# EAGLE board CT_schematic (EAGLE 7.6.0)

Size 100 x 80 mm. Coordinates in mm from the lower left corner, seen from the top.
Outline: 0,0 100,0 100,80 0,80 0,0
Copper layers (1*16): Top 0.035mm / dielectric 1.5mm / Bottom 0.035mm
Design rules "default": minimum track width 10mil, minimum drill 24mil, track to track 8mil, track to pad 8mil, pad to pad 8mil, via to via 8mil, smd to smd 8mil, copper to edge 40mil, drill to drill 8mil, minimum pad ring 10mil, minimum via ring 8mil, stop-mask expansion 4mil, vias tented up to drill 0mil, thermal gap 10mil

## Footprints (pad centres in the part's own frame; a part is rotated, then mirrored left to right if it is on the bottom)
C0603 = smd 0.8 x 0.8: 1 -0.762,0; 2 0.762,0
C0402 = smd 0.5 x 0.5: 1 -0.508,0; 2 0.508,0
C0805 = smd 1.2 x 1.3: 1 -1.016,0; 2 1.016,0
C1206 = smd 1.3 x 1.6: 1 -1.524,0; 2 1.524,0
C1210 = smd 1.2 x 2.5: 1 -1.524,0; 2 1.524,0
EXV-9H = smd 3.505 x 1.676: 1 -2.857,0; 2 2.857,0
L0603 = smd 0.8 x 0.8: 1 -0.762,0; 2 0.762,0
PJ-037B_PACKAGE = drill 3.7 square: 1 12,0 | drill 3.2 square: 2 6,0
R0603 = smd 0.8 x 0.8: 1 -0.762,0; 2 0.762,0
WLCSP36 = smd 0.229 x 0.229: A1 -1,1; A2 -0.6,1; A3 -0.2,1; A4 0.2,1; A5 0.6,1; A6 1,1; B1 -1,0.6; B2 -0.6,0.6; B3 -0.2,0.6; B4 0.2,0.6; B5 0.6,0.6; B6 1,0.6; C1 -1,0.2; C2 -0.6,0.2; C3 -0.2,0.2; C4 0.2,0.2; C5 0.6,0.2; C6 1,0.2; D1 -1,-0.2; D2 -0.6,-0.2; D3 -0.2,-0.2; D4 0.2,-0.2; D5 0.6,-0.2; D6 1,-0.2; E1 -1,-0.6; E2 -0.6,-0.6; E3 -0.2,-0.6; E4 0.2,-0.6; E5 0.6,-0.6; E6 1,-0.6; F1 -1,-1; F2 -0.6,-1; F3 -0.2,-1; F4 0.2,-1; F5 0.6,-1; F6 1,-1
SSOP-28 = smd 1.5 x 0.4: 1 -3.625,4.225; 2 -3.625,3.575; 3 -3.625,2.925; 4 -3.625,2.275; 5 -3.625,1.625; 6 -3.625,0.975; 7 -3.625,0.325; 8 -3.625,-0.325; 9 -3.625,-0.975; 10 -3.625,-1.625; 11 -3.625,-2.275; 12 -3.625,-2.925; 13 -3.625,-3.575; 14 -3.625,-4.225; 15 3.625,-4.225; 16 3.625,-3.575; 17 3.625,-2.925; 18 3.625,-2.275; 19 3.625,-1.625; 20 3.625,-0.975; 21 3.625,-0.325; 22 3.625,0.325; 23 3.625,0.975; 24 3.625,1.625; 25 3.625,2.275; 26 3.625,2.925; 27 3.625,3.575; 28 3.625,4.225
FCI_10118193-0001LF = smd 0.4 x 1.35: 1 -1.3,2.675; 2 -0.65,2.675; 3 0,2.675; 4 0.65,2.675; 5 1.3,2.675 | smd 1.6 x 1.4: 6 -3.2,2.45; 7 3.2,2.45 | smd 1.9 x 1.9: 8 -1.2,0; 9 1.2,0 | hole 0.5: -3.3,0; 3.3,0
TST-110-05-T-D-RA = drill 1 pad 1.7 square: 1 0,0 | drill 1 pad 1.7: 2 0,2.54; 3 2.54,0; 4 2.54,2.54; 5 5.08,0; 6 5.08,2.54; 7 7.62,0; 8 7.62,2.54; 9 10.16,0; 10 10.16,2.54; 11 12.7,0; 12 12.7,2.54; 13 15.24,0; 14 15.24,2.54; 15 17.78,0; 16 17.78,2.54; 17 20.32,0; 18 20.32,2.54; 19 22.86,0; 20 22.86,2.54
DFN-6 = smd 0.805 x 0.3: 1 -0.952,0.5; 2 -0.952,0; 3 -0.952,-0.5; 4 0.952,-0.5; 5 0.952,0; 6 0.952,0.5 | smd 0.61 x 1.42: 7 0,0
ASEK = smd 1.4 x 1: 1 -1.1,-0.8; 2 1.1,-0.8; 3 1.1,0.8; 4 -1.1,0.8
ASFL1 = smd 1.7 x 1.5: 1 -1.27,-1.1; 2 1.27,-1.1; 3 1.27,1.1; 4 -1.27,1.1
WSON-8 = smd 0.3 x 0.6: 1 -0.75,0; 2 0.05,0; 3 0.85,0; 4 1.65,0; 5 1.65,3.8; 6 0.85,3.8; 7 0.05,3.8; 8 -0.75,3.8 | smd 3 x 2.6: PAD 0.45,1.9
SON-6 = smd 0.55 x 0.3: 1 -0.355,0.5 | smd 0.52 x 0.3: 2 -0.37,0; 3 -0.37,-0.5; 4 0.37,-0.5; 5 0.37,0; 6 0.37,0.5
SW_4-1437565-2 = smd 1.4 x 2.1: 1 -2.23,4.55; 2 -2.23,-4.55; 3 2.23,4.55; 4 2.23,-4.55
LGM67K-G1J2-24-Z = smd 0.8 x 1.4: A -2,0; C 0,0
NC7SZ125M5X = smd 1.3 x 0.7: 1 -1.3,0.95; 2 -1.3,0; 3 -1.3,-0.95; 4 1.3,-0.95; 5 1.3,0.95

## Placement (x,y rotation side)
C1  1e-07  [C0603]  -62.23,50.8 0 top  (outside the outline)
C2  1e-07  [C0603]  -15.24,55.88 0 top  (outside the outline)
C3  4.7e-06  [C0603]  -54.61,50.8 0 top  (outside the outline)
C4  1e-07  [C0603]  -19.05,55.88 0 top  (outside the outline)
C5  4.7e-06  [C0603]  -58.42,50.8 0 top  (outside the outline)
C6  1e-08  [C0603]  -22.86,55.88 0 top  (outside the outline)
C7  1e-08  [C0603]  -26.67,55.88 0 top  (outside the outline)
C8  1e-06  [C0603]  -30.48,55.88 0 top  (outside the outline)
C9  1e-07  [C0402]  -19.05,60.96 0 top  (outside the outline)
C10  4.7e-06  [C0805]  -59.69,43.18 0 top  (outside the outline)
C11  1e-07  [C0402]  -22.86,60.96 0 top  (outside the outline)
C12  1e-07  [C0402]  -26.67,60.96 0 top  (outside the outline)
C13  1e-07  [C0402]  -30.48,60.96 0 top  (outside the outline)
C14  1e-07  [C0402]  -34.29,60.96 0 top  (outside the outline)
C15  1e-08  [C0402]  -38.1,60.96 0 top  (outside the outline)
C16  1e-08  [C0402]  -41.91,60.96 0 top  (outside the outline)
C17  1e-08  [C0402]  -45.72,60.96 0 top  (outside the outline)
C18  1e-08  [C0402]  -49.53,60.96 0 top  (outside the outline)
C19  1e-05  [C1206]  -41.91,43.18 0 top  (outside the outline)
C20  1e-05  [C1210]  -29.21,44.45 0 top  (outside the outline)
C21  1e-07  [C0402]  -53.34,60.96 0 top  (outside the outline)
C22  0.0001  [EXV-9H]  -38.1,36.83 0 top  (outside the outline)
C23  0.0001  [EXV-9H]  -49.53,36.83 0 top  (outside the outline)
C24  1e-08  [C0402]  -57.15,60.96 0 top  (outside the outline)
C25  1e-08  [C0402]  -60.96,60.96 0 top  (outside the outline)
F1  240.0  [L0603]  -34.29,55.88 0 top  (outside the outline)
J1  PJ-037B  [PJ-037B_PACKAGE]  -40.64,7.62 0 top  (outside the outline)
R1  10000.0  [R0603]  -25.4,50.8 0 top  (outside the outline)
R2  1000.0  [R0603]  -38.1,55.88 0 top  (outside the outline)
R3  1600.5  [R0603]  -41.91,55.88 0 top  (outside the outline)
R4  4700.0  [R0603]  -45.72,55.88 0 top  (outside the outline)
R5  2200.0  [R0603]  -49.53,55.88 0 top  (outside the outline)
R6  2200.0  [R0603]  -53.34,55.88 0 top  (outside the outline)
R7  4700.0  [R0603]  -57.15,55.88 0 top  (outside the outline)
R8  10000.0  [R0603]  -30.48,50.8 0 top  (outside the outline)
R9  10000.0  [R0603]  -35.56,50.8 0 top  (outside the outline)
R10  10000.0  [R0603]  -40.64,50.8 0 top  (outside the outline)
R11  100000.0  [R0603]  -64.77,43.18 0 top  (outside the outline)
R12  2231.0  [R0603]  -60.96,55.88 0 top  (outside the outline)
R13  1000.0  [R0603]  -64.77,55.88 0 top  (outside the outline)
R14  10000.0  [R0603]  -45.72,50.8 0 top  (outside the outline)
R15  10000.0  [R0603]  -50.8,50.8 0 top  (outside the outline)
R16  9100.0  [R0603]  -15.24,60.96 0 top  (outside the outline)
R17  680000.0  [R0603]  -15.24,50.8 0 top  (outside the outline)
R18  120000.0  [R0603]  -20.32,50.8 0 top  (outside the outline)
U1  stm32f042t6y7  [WLCSP36]  -34.29,43.18 0 top  (outside the outline)
U2  FT232RL-REEL  [SSOP-28]  -20.32,7.62 0 top  (outside the outline)
U3  10118193-0001LF  [FCI_10118193-0001LF]  -19.05,27.94 0 top  (outside the outline)
U4  TST-110-05-T-D-RA  [TST-110-05-T-D-RA]  -58.42,26.67 0 top  (outside the outline)
U5  SI7006-A20-IM  [DFN-6]  -64.77,59.69 0 top  (outside the outline)
U6  ASEK-32.768KHz-ECST  [ASEK]  -29.21,36.83 0 top  (outside the outline)
U7  ASFL1-12MHZ-NCS  [ASFL1]  -46.99,20.32 0 top  (outside the outline)
U8  ASFL1-25MHZ-NCS  [ASFL1]  -63.5,20.32 0 top  (outside the outline)
U9  LP3878SDX-ADJ/NOPB  [WSON-8]  -30.48,17.78 0 top  (outside the outline)
U10  TPS3895ADRYR  [SON-6]  -13.97,64.77 0 top  (outside the outline)
U11  4-1437565-2  [SW_4-1437565-2]  -57.15,6.35 0 top  (outside the outline)
U12  Q65110A2395  [LGM67K-G1J2-24-Z]  -17.78,44.45 0 top  (outside the outline)
U13  nc7sz125m5x  [NC7SZ125M5X]  -46.99,43.18 0 top  (outside the outline)
U14  nc7sz125m5x  [NC7SZ125M5X]  -53.34,43.18 0 top  (outside the outline)

## Library data of the parts
C1-C25 F1 J1 R1-R18 U1-U14 = circuit_tree

## Nets
CLK_U1_B5: U1.B5 U8.3
CLK_U1_B6: U1.B6 U6.3
CLK_U2_27: U2.27 U7.3
GND: C1.2 C2.2 C3.2 C4.2 C5.2 C6.2 C7.2 C8.2 C9.2 C10.2 C11.2 C12.2 C13.2 C14.2 C15.2 C16.2 C17.2 C18.2 C19.2 C20.2 C21.2 C22.2 C23.2 C24.2 C25.2 J1.2 R2.2 R9.2 R13.2 R16.2 R18.2 U1.D6 U1.F1 U2.7 U2.18 U2.21 U2.25 U2.26 U3.5 U3.6 U3.7 U3.8 U3.9 U4.4 U4.6 U4.8 U4.10 U4.12 U4.14 U4.16 U4.18 U4.20 U5.2 U5.7 U6.2 U7.2 U8.2 U9.3 U9.PAD U10.2 U12.C U13.2 U13.3 U14.1 U14.3
NET_U1_B4: R5.1 U1.B4 U5.6
NET_U1_C1: R6.1 U1.C1 U5.1
NET_U1_D5: R4.1 U1.D5 U14.4
NET_U1_E5: C6.1 C7.1 C8.1 F1.1 U1.E5
NET_U1_F5: R3.1 U1.F5 U12.A
NET_U1_F6: R1.1 U1.F6 U11.3 U11.4
NET_U2_14: R8.1 U2.14
NET_U2_17: C11.1 U2.17
NET_U2_19: R9.1 U2.19
NET_U3_1: R7.1 U3.1
NET_U3_2: U2.16 U3.2
NET_U3_3: U2.15 U3.3
NET_U3_19: R7.2
NET_U9_1: C18.1 U9.1
NET_U9_6: R12.2 R13.1 U9.6
NET_U9_8: R11.1 U9.8
NET_U10_1: R15.1 R16.1 U10.1
NET_U10_3: R17.2 R18.1 U10.3
NET_U10_4: R14.1 U10.4 U13.4 U14.2
NET_U11_1: R2.1 U11.1 U11.2
PROC_SYS_SWCLK: U1.B2 U4.9
PROC_SYS_SWDIO: U1.B1 U4.7
PROC_USART1_CTS: U1.C2 U2.3
PROC_USART1_RTS: U1.A1 U2.11
PROC_USART1_RX: U1.A4 U2.1
PROC_USART1_TX: U1.C4 U2.5
RST_OUT_U4_SRESET_B: R10.1 U4.15 U13.1
VCC_S1_11V0: C19.1 C22.1 C23.1 J1.1 R11.2 U9.4
VCC_TIER1_3V3: C1.1 C2.1 C3.1 C4.1 C5.1 C9.1 C10.1 C12.1 C13.1 C14.1 C15.1 C16.1 C17.1 C20.1 C21.1 C24.1 C25.1 F1.2 R1.2 R3.2 R4.2 R5.2 R6.2 R8.2 R10.2 R12.1 R14.2 R15.2 R17.1 U1.A5 U1.E1 U2.4 U2.20 U4.1 U5.5 U6.4 U7.4 U8.4 U9.5 U10.6 U13.5 U14.5

## Tracks (layer width: path | path; a pad name or v marks a point on that pad's centre or on a via)
CLK_U1_B5  (1 unrouted)
CLK_U1_B6  (1 unrouted)
CLK_U2_27  (1 unrouted)
GND  (64 unrouted)
NET_U1_B4  (2 unrouted)
NET_U1_C1  (2 unrouted)
NET_U1_D5  (2 unrouted)
NET_U1_E5  (4 unrouted)
NET_U1_F5  (2 unrouted)
NET_U1_F6  (3 unrouted)
NET_U2_14  (1 unrouted)
NET_U2_17  (1 unrouted)
NET_U2_19  (1 unrouted)
NET_U3_1  (1 unrouted)
NET_U3_2  (1 unrouted)
NET_U3_3  (1 unrouted)
NET_U9_1  (1 unrouted)
NET_U9_6  (2 unrouted)
NET_U9_8  (1 unrouted)
NET_U10_1  (2 unrouted)
NET_U10_3  (2 unrouted)
NET_U10_4  (3 unrouted)
NET_U11_1  (2 unrouted)
PROC_SYS_SWCLK  (1 unrouted)
PROC_SYS_SWDIO  (1 unrouted)
PROC_USART1_CTS  (1 unrouted)
PROC_USART1_RTS  (1 unrouted)
PROC_USART1_RX  (1 unrouted)
PROC_USART1_TX  (1 unrouted)
RST_OUT_U4_SRESET_B  (2 unrouted)
VCC_S1_11V0  (5 unrouted)
VCC_TIER1_3V3  (41 unrouted)